# Altium PCB 2layer.PcbDoc (part 1 of 2)
Units mil, origin at the board's own origin, x right, y up, seen from the top; angles counter-clockwise.
Board outline 4180.03 x 3445.03 mil, 2 copper layers (Top Layer, Bottom Layer); 118 components, 103 nets, 464 pads, 261 vias.
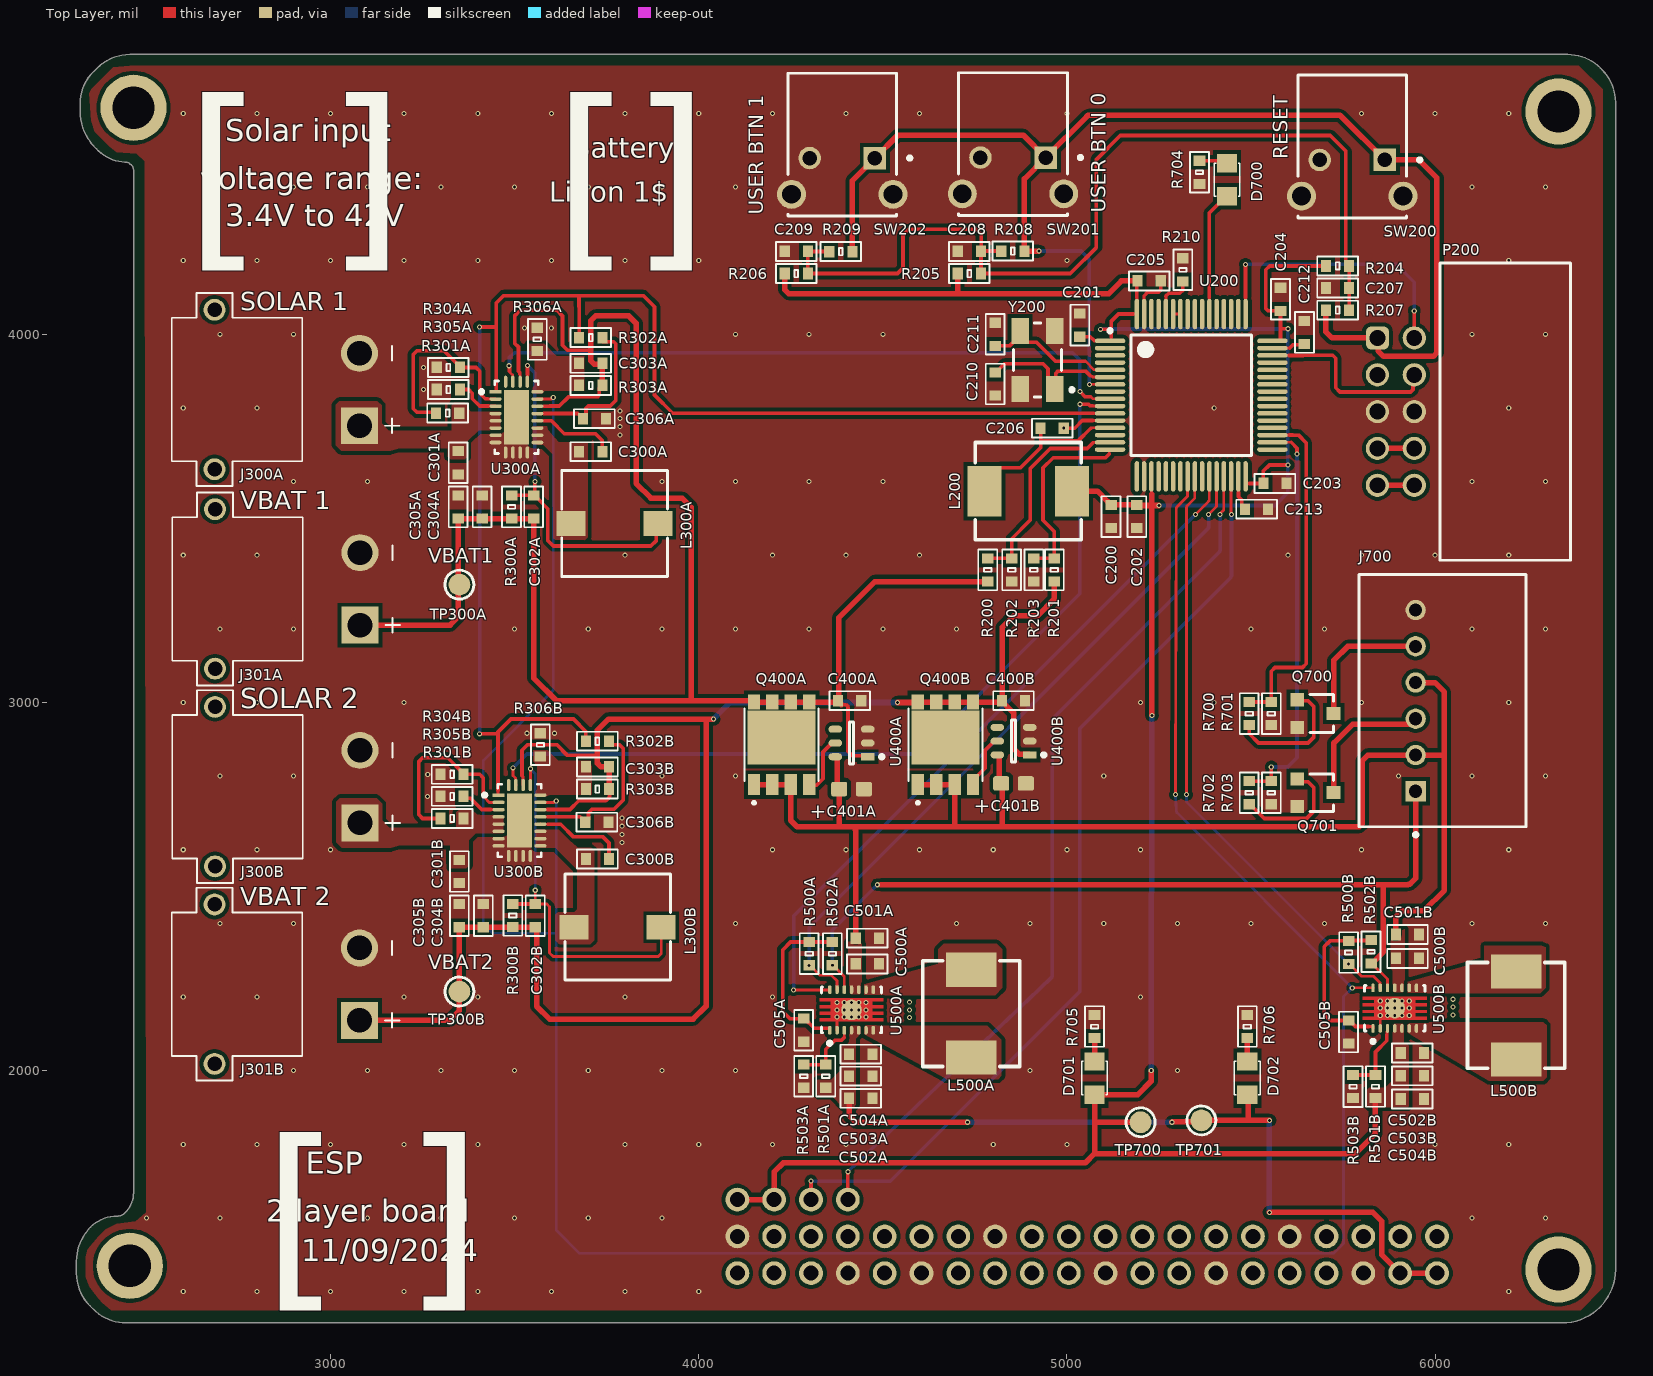
[diagram p0: Top Layer view]
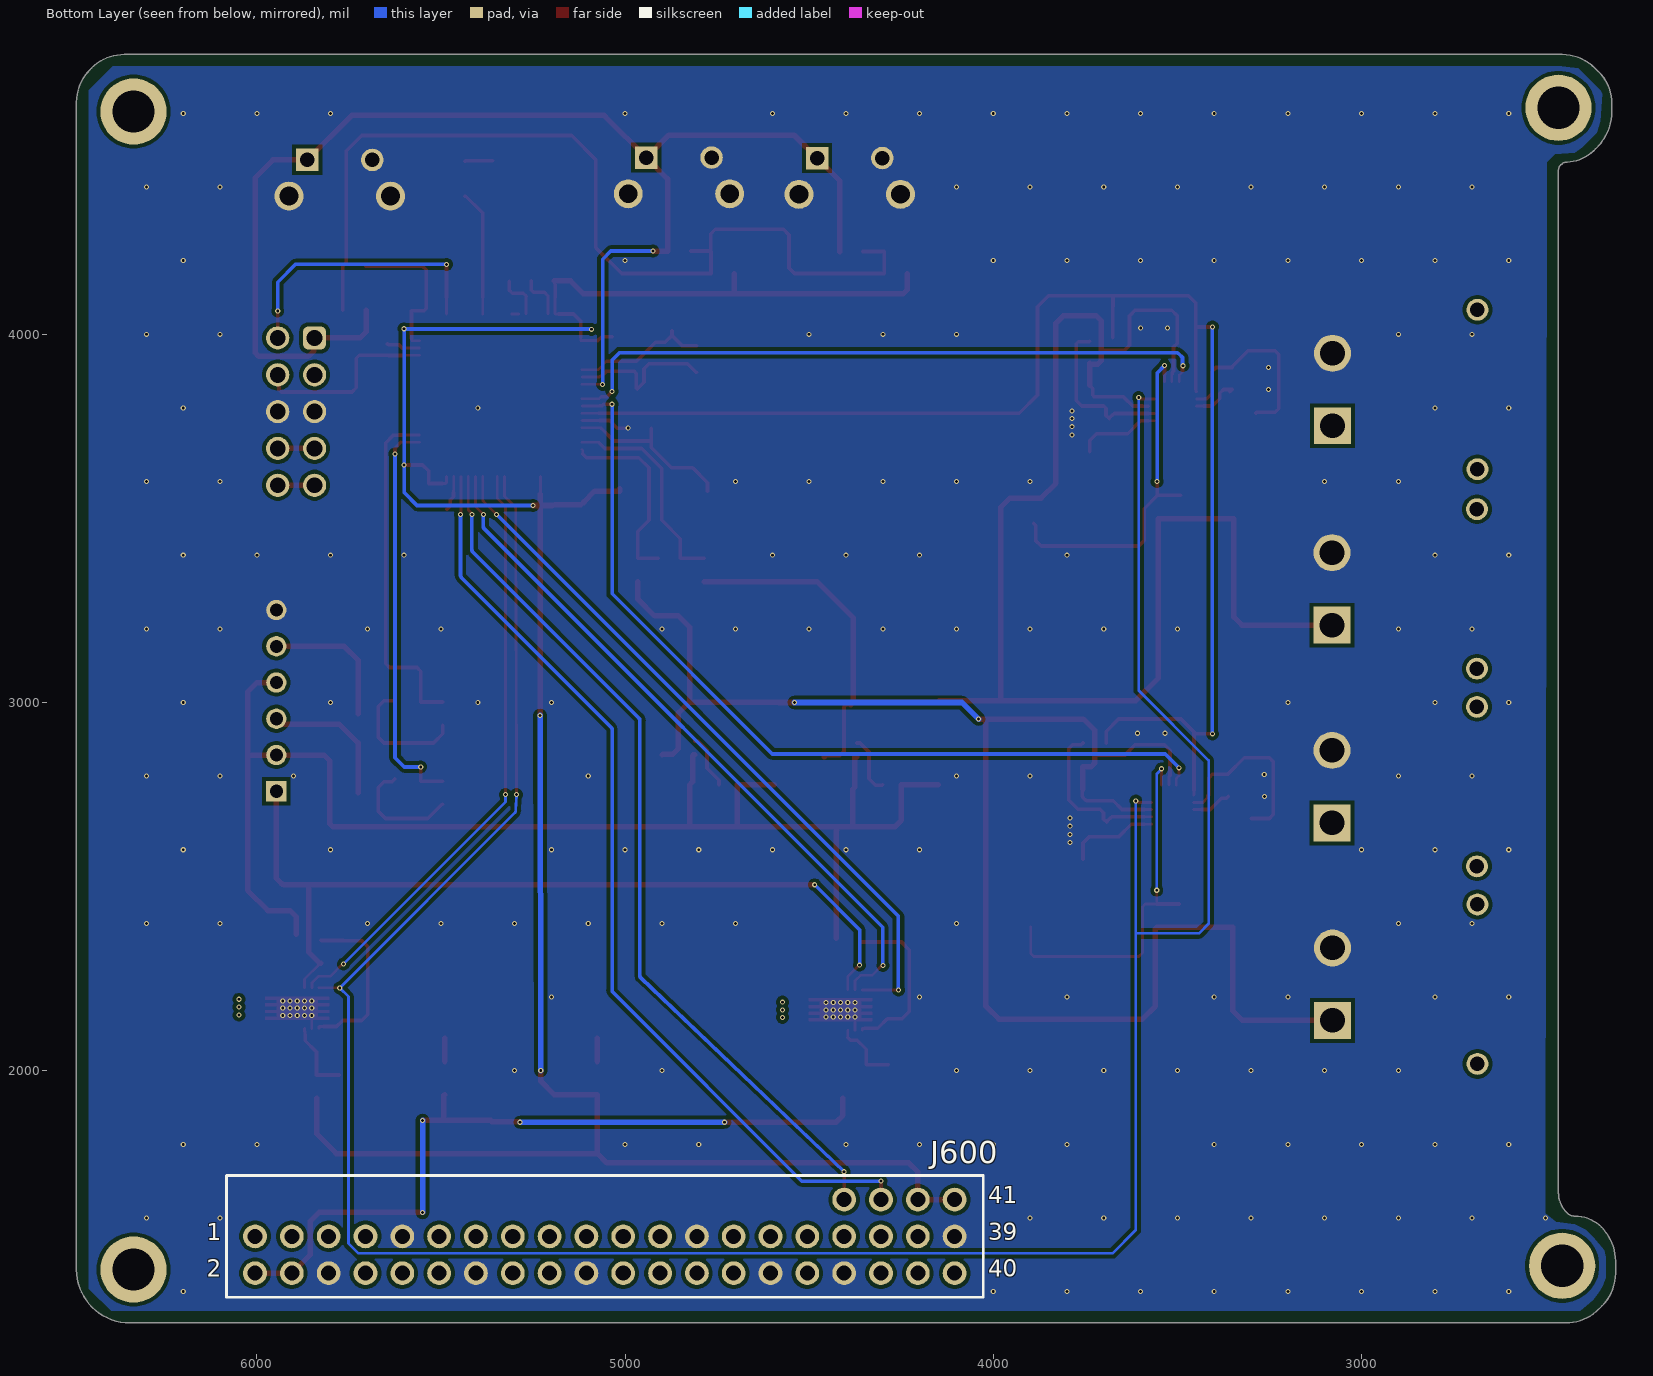
[diagram p1: Bottom Layer view, seen from below]

## Layer stack, top to bottom
Top Solder: solder mask 0.4, Solder Resist, Dk 3.5
Top Layer: signal copper 1.4
Dielectric 1: dielectric 12.6, FR-4, Dk 4.8
Bottom Layer: signal copper 1.4
Bottom Solder: solder mask 0.4, Solder Resist, Dk 3.5

## Board outline
2346.81,1361.1 cw(c2435.71,1450) 2309.99,1450 2309.99,1482.53 2309.98,1482.57 cw(c2441.21,1482.57) 2348.42,1575.37 cw(c2420,1503.79) 2420,1605.02 2420.86,1605.02 ccw(c2420.86,1634.14) 2441.45,1613.55 2442.06,1614.15 ccw(c2386.72,1669.5) 2464.98,1669.23 2464.98,1669.25 2464.99,4446.26 ccw(c2446.62,4446.26) 2456.16,4461.95 2452.44,4465.47 ccw(c2440.53,4433.42) 2441.84,4467.59 cw(c2446.16,4578.27) 2364.61,4503.3 cw(c2461.02,4606.18) 2320.03,4606.26 2319.93,4625.73 2319.93,4625.83 cw(c2443.77,4625.72) 2356.2,4713.29 2366.45,4723.55 cw(c2454.5,4635.5) 2454.5,4760.02 6360,4760.02 cw(c6360,4634.29) 6448.9,4723.19 6453.55,4718.55 cw(c6365.5,4630.5) 6490.02,4630.5 6490.02,1460 6490.01,1459.83 cw(c6345,1460) 6345,1314.98 6344.96,1314.98 2445,1314.98 cw(c2445,1440.71) 2356.1,1351.81

## Design rules (kind name [scope] priority, off if disabled: settings)
Clearance [All] p1: gap=10 ignorepadtopadclearanceinfootprint=TRUE
PolygonConnect [All] p1: connectstyle=Direct reliefconductorwidth=10 reliefentries=4 polygonreliefangle="90 Angle" airgapwidth=10
RoutingVias [All] p1: holewidth=9.84 width=15.75 viastyle="Through Hole" minholewidth=7.87 minwidth=7.87 maxholewidth=19.68 maxwidth=39.37
SolderMaskExpansion [All] p1: expansion=4 istentingtop=FALSE
SupplyNets "Schematic Supply Nets_6" [InNet('VBUS')] p1: voltage=0.000
SupplyNets "Schematic Supply Nets_5" [InNet('GND')] p2: voltage=0.000
SupplyNets "Schematic Supply Nets_4" [InNet('3.3VDDA')] p3: voltage=0.000
SupplyNets "Schematic Supply Nets_3" [InNet('5V_STLINK')] p4: voltage=0.000
SupplyNets "Schematic Supply Nets_2" [InNet('3.3V_STLINK')] p5: voltage=0.000
SupplyNets "Schematic Supply Nets_1" [InNet('3.3V')] p6: voltage=0.000
SupplyNets "Schematic Supply Nets" [InNet('5V')] p7: voltage=0.000
UnRoutedNet [All] p1: checkbadconnections=TRUE
Width [All] p1: maxlimit=50 minlimit=5 preferedwidth=15 minimp=50.000000 maximp=50.000000 favimp=50.000000
29 further rules are at their usual default settings.

## Classes and differential pairs
channel class "MPPT CC CV charger (A)": MPPT_charger1 MPPT_charger2
channel class "Ideal Diode (A)": "Ideal Diode1" "Ideal Diode2"
component class uC: C200 C201 C202 C203 C204 C205 C206 C207 C208 C209 C210 C211 C212 C213 L200 P200 R200 R201 R202 R203 R204 R205 R206 R207 R208 R209 R210 SW200 SW201 SW202 U200 Y200
component class Peripherals: D700 D701 D702 J700 Q700 Q701 R700 R701 R702 R703 R704 R705 R706 TP700 TP701
component class MPPT_charger2: C300B C301B C302B C303B C304B C305B C306B J301B L300B R300B R301B R302B R303B R304B R306A TP300B U300b
component class MPPT_charger1: C300A C301A C302A C303A C304A C305A C306A J300A J301A L300A R300A R301A R302A R303A R304A R305A R306A TP300B U300b
component class "Main connector": J600
component class "Ideal Diode2": C400B C401B Q400B U400B
component class "Ideal Diode1": C400A C401A Q400A U400A
component class buck_boost: 3 C500B C502B C503B C504B C505B L500B R500B R501B R502B R503B U500B

## Components (designator, comment, footprint, x,y, rotation, side; value= is the part's Value field where it differs from the comment)
C200 "4u7" CN-SMD-0603 5120,3505 r90 top
C201 "100n" CN-SMD-0603 5035,4025 r270 top
C202 "100n" CN-SMD-0603 5190,3505 r90 top
C203 "100n" CN-SMD-0603 5565,3595 r180 top
C204 "100n" CN-SMD-0603 5580,4095 r270 top
C205 "100n" CN-SMD-0603 5223.5,4145 r180 top
C206 "1u" CN-SMD-0603 4960,3745 r180 top
C207 "100n" CN-SMD-0603 5734.98,4125.59 r0 top
C208 "100n" CN-SMD-0603 4735,4225 r0 top
C209 "100n" CN-SMD-0603 4265,4225 r0 top
C210 "20p" CN-SMD-0603 4805,3865 r90 top
C211 "20p" CN-SMD-0603 4805,4000 r270 top
C212 "2u2" CN-SMD-0603 5645,4005 r270 top
C213 "2u2" CN-SMD-0603 5515,3525 r180 top
C300A "100n" CN-SMD-0603 3706.71,3681.1 r0 top
C300B "100n" CN-SMD-0603 3725,2575 r0 top (schematic designator C300A)
C301A "10u" CN-SMD-0603 3346.71,3651.1 r90 top
C301B "10u" CN-SMD-0603 3350,2541 r90 top (schematic designator C301A)
C302A "1u" CN-SMD-0603 3551.71,3531.1 r270 top
C302B "1u" CN-SMD-0603 3556,2421 r270 top (schematic designator C302A)
C303A "10p" CN-SMD-0603 3706.71,3921.1 r0 top
C303B "10p" CN-SMD-0603 3725,2825 r0 top (schematic designator C303A)
C304A "22u" CN-SMD-0603 3411.71,3531.1 r270 top
C304B "22u" CN-SMD-0603 3415,2421 r270 top (schematic designator C304A)
C305A "22u" CN-SMD-0603 3346.71,3531.1 r270 top
C305B "22u" CN-SMD-0603 3350,2421 r270 top (schematic designator C305A)
C306A "1u" CN-SMD-0603 3716.75,3770.95 r180 top
C306B "1u" CN-SMD-0603 3723.5,2675 r180 top (schematic designator C306A)
C400A "100n" CN-SMD-0603 4410,3005 r180 top
C400B "100n" CN-SMD-0603 4855,3005 r180 top (schematic designator C400A)
C401A "22u" CAP_TANT_0603 4415,2765 r0 top
C401B "22u" CAP_TANT_0603 4855,2780 r0 top (schematic designator C401A)
C500A "10u" CN-SMD-0603 4458,2290 r180 top
C500B "10u" CN-SMD-0603 5925,2305 r180 top
C501A "10u" CN-SMD-0603 4458,2360 r180 top
C501B "10u" CN-SMD-0603 5925,2370 r180 top
C502A "22u" CN-SMD-0603 4440,1925 r0 top
C502B "22u" CN-SMD-0603 5938,2048 r0 top
C503A "22u" CN-SMD-0603 4440,1985 r0 top
C503B "22u" CN-SMD-0603 5938,1986 r0 top
C504A "22u" CN-SMD-0603 4440,2045 r0 top
C504B "22u" CN-SMD-0603 5938,1923 r0 top
C505A "100n" CN-SMD-0603 4285,2110 r90 top
C505B "100n" CN-SMD-0603 5765,2105 r90 top
D700 "LED" LED-0805-Green 5435,4375 r90 top
D701 "LED" LED-0805-Green 5075,1935 r90 top
D702 "LED" LED-0805-Green 5490,1935 r90 top
J300A "XT30PW-M" AMASS_XT30PW-M 2685,3850 r90 top
J300B "XT30PW-M" AMASS_XT30PW-M 2686.3,2771.57 r90 top (schematic designator J300A)
J301A "XT30PW-M" AMASS_XT30PW-M 2686.3,3308.43 r90 top
J301B "XT30PW-M" AMASS_XT30PW-M 2685,2235 r90 top (schematic designator J301A)
J600 "RPI GPIO Connector + 4 Cubesat pins" "header 40 pins" 5055,1500 r180 bottom
J700 "S6B-XH-A-1(LF)(SN)" FP-S6B-XH-A-1_LF_SN-MFG 6020,3005 r270 top
L200 "4u7" L-SMD-0630 4895,3574 r90 top
L300A "10u" L-SMD-M-7.3x4.5 3771.71,3486.1 r90 top
L300B "10u" L-SMD-M-7.3x4.5 3780,2390 r90 top (schematic designator L300A)
L500A "1u5" L-SMD-0630 4740,2155 r0 top
L500B "1u5" L-SMD-0630 6220,2150 r0 top
P200 "61201021721" 61201021721 6190,3790 r90 top
Q400A "TPCA8120" "Mosfet P channel" 4225,2885 r90 top
Q400B "TPCA8120" "Mosfet P channel" 4670,2885 r90 top (schematic designator Q400A)
Q700 "AO3400" SOT23-123 5675,2970 r270 top
Q701 "AO3400" SOT23-123 5675,2755 r270 top
R200 "10k" RES-SMD-0603 4785,3360 r90 top
R201 "10k" RES-SMD-0603 4965.63,3359.98 r90 top
R202 "33k" RES-SMD-0603 4850,3360 r270 top
R203 "33k" RES-SMD-0603 4910,3360 r270 top
R204 "10k" RES-SMD-0603 5734.98,4185.59 r0 top
R205 "10k" RES-SMD-0603 4735,4165 r0 top
R206 "10k" RES-SMD-0603 4265,4165 r0 top (schematic designator 206)
R207 "100R" RES-SMD-0603 5734.98,4065.59 r180 top
R208 "100R" RES-SMD-0603 4853,4226 r0 top
R209 "100R" RES-SMD-0603 4385.84,4224.59 r0 top
R210 "10k" RES-SMD-0603 5315,4175 r90 top
R300A "0.025R" RES-SMD-0603 3491.71,3531.1 r90 top
R300B "0.025R" RES-SMD-0603 3495,2421.5 r90 top (schematic designator R300A)
R301A "300k" RES-SMD-0603 3318,3786 r0 top
R301B "300k" RES-SMD-0603 3330,2685 r0 top (schematic designator R301A)
R302A "10k" RES-SMD-0603 3706.71,3991.1 r0 top
R302B "10k" RES-SMD-0603 3725,2895 r0 top (schematic designator R302A)
R303A "1M" RES-SMD-0603 3706.71,3861.1 r180 top
R303B "1M" RES-SMD-0603 3725,2765 r180 top (schematic designator R303A)
R304A "33k" RES-SMD-0603 3320,3910 r0 top
R304B "33k" RES-SMD-0603 3330,2805 r0 top (schematic designator R304A)
R305A "6k4" RES-SMD-0603 3320,3850 r0 top
R305B "6k4" RES-SMD-0603 3330,2745 r0 top (schematic designator R305A)
R306A "309k" RES-SMD-0603 3561.71,3986.1 r90 top
R306B "309k" RES-SMD-0603 3570,2885 r90 top (schematic designator R306A)
R500A "10k" RES-SMD-0603 4300,2318 r270 top
R500B "10k" RES-SMD-0603 5765,2321 r270 top
R501A "1M" RES-SMD-0603 4345,1985 r90 top
R501B "1M" RES-SMD-0603 5838,1957 r90 top
R502A "10k" RES-SMD-0603 4363,2318 r270 top
R502B "10k" RES-SMD-0603 5826,2323 r270 top
R503A "180k/110k" RES-SMD-0603 4285,1985 r270 top
R503B "180k/110k" RES-SMD-0603 5777,1957 r270 top
R700 "100R" RES-SMD-0603 5495,2970 r90 top
R701 "10k" RES-SMD-0603 5555,2970 r270 top
R702 "100R" RES-SMD-0603 5495,2755 r90 top
R703 "10k" RES-SMD-0603 5555,2755 r270 top
R704 "1k" RES-SMD-0603 5360,4440 r270 top
R705 "1k" RES-SMD-0603 5075,2120 r90 top
R706 "2k2" RES-SMD-0603 5490,2120 r90 top
SW200 "EVQ-PF006K" FP-EVQ-PF006K-MFG 5775,4510 r180 top
SW201 "EVQ-PF006K" FP-EVQ-PF006K-MFG 4853.58,4516.42 r180 top
SW202 "EVQ-PF006K" FP-EVQ-PF006K-MFG 4390,4515 r180 top
TP300A "Test-Point" TESTPOINT 3350,3320 r90 top
TP300B "Test-Point" TESTPOINT 3350,2215 r90 top (schematic designator TP300A)
TP700 "Test-Point" TESTPOINT 5200,1860 r90 top
TP701 "Test-Point" TESTPOINT 5365,1865 r90 top
U200 "STM32F405RGT6" STM-LQFP64_M 5337.64,3834.53 r0 top
U300A "LT8611EUDD#TRPBF" FP-UDD-24-05-08-1833-IPC_B 3505,3775 r0 top
U300B "LT8611EUDD#TRPBF" FP-UDD-24-05-08-1833-IPC_B 3513.29,2679.53 r0 top (schematic designator U300A)
U400A "LTC4412ES6#TRMPBF" FP-S6-6-05-08-1636-IPC_C 4415,2890 r180 top
U400B "LTC4412ES6#TRMPBF" FP-S6-6-05-08-1636-IPC_C 4855,2895 r180 top (schematic designator U400A)
U500A "TPS63020DSJT" FP-DSJ0014A-MFG 4415,2165 r90 top
U500B "TPS63020DSJT" FP-DSJ0014A-MFG 5890.31,2169.88 r90 top
Y200 "8MHz" FP-ABM3B-MFG 4920,3930 r90 top

## Footprints (in the part's own frame and the unit in brackets; to place one, negate y for a bottom-side part, rotate by r counter-clockwise, add the part's x,y. Pads: shape width x height; smd on the part's side, far side on the other; paste and mask are expansions set on the pad)
61201021721 [mm] "10 pins, right angled, gold plating"
  rrect50% 1.6x1.6 hole 1.1: 1(5.08,8.805)
  round 1.6 hole 1.1: 2(5.08,6.265) 3(2.54,8.805) 4(2.54,6.265) 5(0,8.805) 6(0,6.265) 7(-2.54,8.805) 8(-2.54,6.265) 9(-5.08,8.805) 10(-5.08,6.265)
  silkscreen extent -10.26,-4.5 10.26,4.5, body extent -10.18,-4.42 10.18,9.13, height 9.23
AMASS_XT30PW-M [mm]
  round 2.55 hole 1.7: N(2.5,-10)
  rect 2.55x2.55 / inner round 2.55 / far side rect 2.55x2.55 hole 1.7: P(-2.5,-10)
  round 1.508 hole 1: S1(5.5,0) S2(-5.5,0)
  silkscreen extent -6.65,-12.75 6.65,2.95, body extent -6.65,-11 6.65,2.95, height 5
CAP_TANT_0603 [mm]
  rrect25% 1.1x1 smd: A(-0.85,0) K(0.85,0)
  body extent -0.9,-0.53 0.9,0.53, height 0.91
CN-SMD-0603 [mm]
  rect 0.7x0.8 smd: 1(-0.8,0) 2(0.8,0)
  silkscreen extent -1.4,-0.65 1.4,0.65, body extent -0.8,-0.4 0.8,0.4, height 0.3
FP-ABM3B-MFG [mm]
  rect 1.8x1.2 smd paste+0 mask+0: 1(-2,-1.2) 2(2,-1.2) 3(2,1.2) 4(-2,1.2)
  silkscreen extent -2.55,-2.5 2.55,1.65, body extent -3,-1.9 3,1.9, height 0.25
FP-DSJ0014A-MFG [mm]
  rrect100% 0.6x0.24 smd paste+0 mask+0: 1(-1.4,1.5) 2(-1.4,1) 3(-1.4,0.5) 4(-1.4,0) 5(-1.4,-0.5) 6(-1.4,-1) 7(-1.4,-1.5) 8(1.4,-1.5) 9(1.4,-1) 10(1.4,-0.5) 11(1.4,0) 12(1.4,0.5) 13(1.4,1) 14(1.4,1.5)
  round 1.422 smd paste-1000 mask+0: 15(0,0)
  Top Layer region: -0.79,2.2 -0.59,2.2 -0.59,1.425 -0.33,1.425 -0.33,2.2 -0.13,2.2 -0.13,1.425 0.13,1.425 0.13,2.2 0.33,2.2 0.33,1.425 0.59,1.425 0.59,2.2 0.79,2.2 0.79,-2.2 0.59,-2.2 0.59,-1.425 0.33,-1.425 0.33,-2.2 0.13,-2.2 0.13,-1.425 -0.13,-1.425 -0.13,-2.2 -0.33,-2.2 -0.33,-1.425 -0.59,-1.425 -0.59,-2.2 -0.79,-2.2 -0.79,2.2
  silkscreen extent -2.42,-2.07 1.58,2.07, body extent -1.8,-2.3 1.8,2.3, height 0.25
FP-EVQ-PF006K-MFG [mm]
  round 2 hole 1.3 paste-2539.97 mask+0: 1(-3.5,3.425) 2(3.5,3.425)
  rect 1.55x1.55 hole 1 paste-2539.97 mask+0: A(-2.25,0.925)
  round 1.55 hole 1 paste-2539.97 mask+0: B(2.25,0.925)
  silkscreen extent -4.78,-4.92 3.75,4.92, body extent -4.6,-5.02 4.6,5.02, height 0.25
FP-S6-6-05-08-1636-IPC_C [mm]
  rect 0.94x0.486 smd paste+0 mask+0: 1(-1.115,0.95)
  rrect100% 0.94x0.486 smd paste+0 mask+0: 2(-1.115,0) 3(-1.115,-0.95) 4(1.116,-0.95) 5(1.116,0) 6(1.116,0.95)
  silkscreen extent -2.21,-1.45 0.15,1.45, body extent -1.69,-1.55 1.69,1.55, height 0.25
FP-S6B-XH-A-1_LF_SN-MFG [mm]
  rect 1.4x1.4 hole 0.9 paste-2539.97 mask+0: 1(6.25,-1.85)
  round 1.4 hole 0.9 paste-2539.97 mask+0: 2(3.75,-1.85) 3(1.25,-1.85) 4(-1.25,-1.85) 5(-3.75,-1.85) 6(-6.25,-1.85)
  silkscreen extent -8.7,-5.75 9.37,5.75, body extent -8.8,-5.85 8.8,5.85, height 0.25
FP-UDD-24-05-08-1833-IPC_B [mm]
  rect 0.831x0.242 smd paste+0 mask+0: 1(-1.441,1.75)
  rrect100% 0.831x0.242 smd paste+0 mask+0: 2(-1.441,1.25) 3(-1.441,0.75) 4(-1.441,0.25) 5(-1.441,-0.25) 6(-1.441,-0.75) 7(-1.441,-1.25) 8(-1.441,-1.75) 13(1.441,-1.75) 14(1.441,-1.25) 15(1.441,-0.75) 16(1.441,-0.25) 17(1.441,0.25) 18(1.441,0.75) 19(1.441,1.25) 20(1.441,1.75)
  rrect100% 0.242x0.831 smd paste+0 mask+0: 9(-0.75,-2.441) 10(-0.25,-2.441) 11(0.25,-2.441) 12(0.75,-2.441) 21(0.75,2.441) 22(0.25,2.441) 23(-0.25,2.441) 24(-0.75,2.441)
  rect 1.75x3.75 smd paste-1000 mask+0: 25(0,0)
  silkscreen extent -2.53,-2.5 1.5,2.5, body extent -2.11,-3.11 2.11,3.11, height 0.25
"header 40 pins" [mil]
  round 64.57 hole 40.95: 1(-950,50) 2(-950,-50) 3(-850,50) 4(-850,-50) 5(-750,50) 6(-750,-50) 7(-650,50) 8(-650,-50) 9(-550,50) 10(-550,-50) 11(-450,50) 12(-450,-50) 13(-350,50) 14(-350,-50) 15(-250,50) 16(-250,-50) 17(-150,50) 18(-150,-50) 19(-50,50) 20(-50,-50) 21(50,50) 22(50,-50) 23(150,50) 24(150,-50) 25(250,50) 26(250,-50) 27(350,50) 28(350,-50) 29(450,50) 30(450,-50) 31(550,50) 32(550,-50) 33(650,50) 34(650,-50) 35(750,50) 36(750,-50) 37(850,50) 38(850,-50) 39(950,50) 40(950,-50) 41(950,150) 42(850,150) 43(750,150) 44(650,150)
  silkscreen extent -1028,-115 1028,215, body extent -1010,-98 1010,197, height 335
L-SMD-0630 [mm] "6.6x6.6"
  rect 3.5x2.35 smd: 1(0,-3.025) 2(0,3.025)
  silkscreen extent -3.35,-3.65 3.35,3.65, body extent -3.35,-3.65 3.35,3.65, height 2.81
L-SMD-M-7.3x4.5 [mm] "WE-PDA SMD Shielded Power Inductor, 7345"
  rect 1.7x2 smd: 1(0,3) 2(0,-3)
  silkscreen extent -3.65,-3.65 3.65,3.65, body extent -3.65,-3.65 3.65,3.65, height 4.05
LED-0805-Green [mil]
  rect 50x55 smd: 1(0,0) 2(90,0)
  silkscreen extent 0,-35 90,35, body extent 5,-25 85,25, height 43
"Mosfet P channel" [mm] "TPCA8120"
  rect 1.45x0.85 smd: 1(-2.75,1.905) 2(-2.75,0.635) 3(-2.75,-0.635) 4(-2.75,-1.905)
  rect 1.05x0.85 smd: 5(2.95,-1.905) 6(2.95,-0.635) 7(2.95,0.635) 8(2.95,1.905)
  rect 3.75x4.7 smd paste-3: 9(0.508,0)
  silkscreen extent -4.1,-2.55 2.5,2.55, body extent -3,-2.65 3,2.65, height 1
RES-SMD-0603 [mm]
  rect 0.7x0.8 smd: 1(-0.8,0) 2(0.8,0)
  silkscreen extent -1.4,-0.65 1.4,0.65, body extent -0.8,-0.4 0.8,0.4, height 0.43
SOT23-123 [mm] "SOT23, 1=bottom-left, 2=top, 3=bottom-right"
  rect 0.9x0.95 smd: 1(-0.95,-1.25) 2(0,1.25)
  rect 0.9x0.95 smd mask+0: 3(0.95,-1.25)
  silkscreen extent -1.3,-0.38 1.3,1.25, body extent -1.52,-1.23 1.48,1.27, height 1.06
STM-LQFP64_M [mm] "Thin QFP, 64-Leads, Body 10x10mm, Pitch 0.5mm, IPC Low Density"
  oval 2.1x0.3 smd: 1(-5.6,3.75) 2(-5.6,3.25) 3(-5.6,2.75) 4(-5.6,2.25) 5(-5.6,1.75) 6(-5.6,1.25) 7(-5.6,0.75) 8(-5.6,0.25) 9(-5.6,-0.25) 10(-5.6,-0.75) 11(-5.6,-1.25) 12(-5.6,-1.75) 13(-5.6,-2.25) 14(-5.6,-2.75) 15(-5.6,-3.25) 16(-5.6,-3.75) 33(5.6,-3.75) 34(5.6,-3.25) 35(5.6,-2.75) 36(5.6,-2.25) 37(5.6,-1.75) 38(5.6,-1.25) 39(5.6,-0.75) 40(5.6,-0.25) 41(5.6,0.25) 42(5.6,0.75) 43(5.6,1.25) 44(5.6,1.75) 45(5.6,2.25) 46(5.6,2.75) 47(5.6,3.25) 48(5.6,3.75)
  oval 0.3x2.1 smd: 17(-3.75,-5.6) 18(-3.25,-5.6) 19(-2.75,-5.6) 20(-2.25,-5.6) 21(-1.75,-5.6) 22(-1.25,-5.6) 23(-0.75,-5.6) 24(-0.25,-5.6) 25(0.25,-5.6) 26(0.75,-5.6) 27(1.25,-5.6) 28(1.75,-5.6) 29(2.25,-5.6) 30(2.75,-5.6) 31(3.25,-5.6) 32(3.75,-5.6) 49(3.75,5.6) 50(3.25,5.6) 51(2.75,5.6) 52(2.25,5.6) 53(1.75,5.6) 54(1.25,5.6) 55(0.75,5.6) 56(0.25,5.6) 57(-0.25,5.6) 58(-0.75,5.6) 59(-1.25,5.6) 60(-1.75,5.6) 61(-2.25,5.6) 62(-2.75,5.6) 63(-3.25,5.6) 64(-3.75,5.6)
  silkscreen extent -5.72,-4.15 4.15,4.57, body extent -5,-5 5,5, height 1.6
TESTPOINT [mm]
  round 1.5 smd: 1(0,0)
  silkscreen extent -1,-1 1,1

## Part data
C200 C201 C202 C203 C204 C205 C206 C207 C208 C209 C210 C211 C212 C213 C300A C300B C301A C301B C302A C302B C303A C303B C304A C304B C305A C305B C306A C306B C400A C400B C500A C500B C501A C501B C502A C502B C503A C503B C504A C504B C505A C505B: library part CN
C401A C401B: library part CAP_TANT_0603, "Capacitor SMD Tantalum 0603"
D700 D701 D702: library part "LED SMD"
J300A J300B J301A J301B: "Socket; DC supply; XT30; male; PIN: 2; on PCBs; THT; Colour: yellow"
J600: library part "Header 40 pins"
J700: library part CMP-17439-000023-1, "CONN HEADER R/A P6OS 2.5MM"
L200 L300A L300B L500A L500B: library part L-SMD-1
P200: library part CMP-1502-00021-2
Q400A Q400B: library part "Mosfet P channel"
Q700 Q701: "N-MOS 30V 5.8A"
R200 R201 R202 R203 R204 R205 R206 R207 R208 R209 R210 R300A R300B R301A R301B R302A R302B R303A R303B R304A R304B R305A R305B R306A R306B R500A R500B R501A R501B R502A R502B R503A R503B R700 R701 R702 R703 R704 R705 R706: library part Res-SMD, "Resistor"
SW200 SW201 SW202: library part CMP-00287-39802768-1, "EVQ-PF006K Switch Tactile N.O. SPST Round Button PC Pins 0.02A 15VDC 1N Thru-Hole Bulk"
U200: library part CMP-0243-00019-3, "ARM Cortex-M4 32-bit MCU+FPU, 210 DMIPS, 1024 kB Flash, 192 kB Internal RAM, 51 I/Os, 64-pin LQFP, -40 to 85 degC, Tray"
U300A U300B: library part CMP-0491-02169-2, "IC REG BUCK ADJ 2.5A 24QFN"
U400A U400B: library part CMP-0479-00425-2, "IC OR CTRLR SRC SELECT TSOT23-6"
U500A U500B: library part CMP-2000-07282-2, "IC REG BCK BST ADJ 3.5A 14VSON"
Y200: library part CMP-1688-00002-2, "Crystal 8MHz ±20ppm 18pF SMD-4 5mm x 3.2mm"

## Free pads (board coordinates)
  round 180 hole 115: 3(2455,1470) 3(2465,4615) 3(6335,1460) 3(6335,4605)

## Via types
v1: diameter 13.78, hole 7.87, Top Layer to Bottom Layer, 261 vias

## Nets (pads, with @x,y where several pads share a name; then routed paths per layer and width w, separated by ;. In a path a pad name is that pad's centre, name@x,y a point inside that pad or via, vN(x,y) a via of type N, cw(c..) or ccw(c..) an arc to the next point about the centre after c; other vN are vias at no path point)
3.3V: C200.2 C201.2 C202.2 C203.2 C204.2 C205.2 C502B.1 C503B.1 C504B.1 D701.1 J600.41 J600.42 L200.1 R204.1 R205.1 R206.1 R501B.1 TP700.1 U200.1 U200.19 U200.32 U200.48 U200.64 U500B.4 U500B.5 | length 7663.9
  Top Layer w7.5: 5074.01,3982.99 5116.34,3982.99 U200.1@5117.17,3982.17 ; U200.1@5120.17,3982.17 5120.17,3990 ; 5180,4055 U200.64@5190,4055 5190,4100 ; 5229.37,3565.63 U200.19@5229.37,3614.06 cw(c5221.9,3613.39) 5229.4,3613.39 5229.4,3578.62 ccw(c5249.06,3578.62) U200.19@5229.4,3578.29 ; U200.32@5485.28,3614.06 5485.28,3596.99 5487.27,3595 5495,3595 ; U200.48@5558.11,3982.17 5578.01,3982.17 5580,3984.16 5580,3990
  Top Layer w10: C201.2@5035,3993.5 5063.5,3993.5 5074.01,3982.99 ; v1(5091.42,4013.58) 5120,4013.58 ; 5120,3992.17 5120,4013.58 ; 5180,4055 5140,4055 5120,4035 5120,4013.58 ; 5190,4100 5189.69,4100.31 5189.69,4112.97 5190,4113.28 5190,4134.25 C205.2@5192.01,4145 ; 5495,3595 C203.2@5533.5,3595 5533.5,3628.5 5550,3645 v1(5600,3645) ; 5580,3990 5580,4015 ; v1(5600,4015) 5580,4015 ; R204.1@5703.48,4185.59 5550.59,4185.59 5540,4175 5540,4070 5546.5,4063.5 C204.2@5580,4063.5 5580,4015
  Top Layer w15: J600.41@4105,1650 J600.42@4205,1650 4205,1725 4230,1750 5050,1750 5075,1775 ; R206.1@4233.5,4165 4233.5,4121.5 4245,4110 4705,4110 ; R205.1@4703.5,4165 4703.5,4111.5 4705,4110 ; L200.1@5014.09,3574 5082.5,3574 5111.75,3544.74 C200.2@5111.75,3542.78 ; L200.1@5014.09,3580 L200.1@5015,3579.09 ; C200.2@5120,3536.5 C202.2@5190,3536.5 5198.25,3535 5230,3535 ; C205.2@5192.01,4145 5148,4145 5113,4110 4705,4110 ; TP700.1@5200,1860 5075,1860 ; v1(5229,2000) 5229,1971.5 5192.5,1935 D701.1@5075,1935 5075,1860 ; 5230,3565 5230,3535 ; v1(5231,2965) 5230,2966 5230,3006.21 5230,3535 ; v1(5250,3535) 5230,3535 ; R501B.1@5838,1925.5 5838,1829 5784,1775 5075,1775 ; 5075,1775 5075,1860
  Bottom Layer w10: v1(5091.42,4013.58) 5092.13,4014.29 5599.29,4014.29 v1(5600,4015) v1(5600,3645) 5600,3570 5565,3535 v1(5250,3535)
  Bottom Layer w15: v1(5229,2000) v1(5231,2965)
3.3V_STLINK: P200.7 P200.8 | length 100
  Top Layer w15: P200.7@5843.35,3690 P200.8@5943.35,3690
3.3VDDA: C206.2 L200.2 U200.13 | length 471.4
  Top Layer w7.5: 5065.94,3745 5066.89,3745.94 U200.13@5117.17,3745.94
  Top Layer w10: L200.2@4775.91,3574 4775.91,3596.64 4817.17,3637.9 4874.61,3637.9 4928.5,3691.79 4928.5,3710 ; C206.2@4928.5,3745 4928.5,3710 ; 5065.94,3745 5065,3745 5030,3710 4928.5,3710
5V: C502A.1 C503A.1 C504A.1 D702.1 J600.2 J600.4 R501A.1 TP701.1 U500A.4 U500A.5 | length 2095.2
  Top Layer w15: C502A.1@4408.5,1925 4408.5,1878.5 4427,1860 v1(4730,1860) ; v1(5285,1860) 5285.72,1860.72 5360.72,1860.72 TP701.1@5365,1865 5492,1865 ; D702.1@5490,1935 5492,1933 5492,1865 ; v1(5550,1615) 5831,1615 5855.22,1590.79 5855.22,1499.79 J600.4@5905,1450 J600.2@6005,1450 ; v1(5550,1865) 5492,1865
  Bottom Layer w15: v1(4730,1860) v1(5285,1860) ; v1(5550,1615) v1(5550,1865)
5V_STLINK: P200.9 P200.10 | length 100
  Top Layer w15: P200.9@5843.35,3590 P200.10@5943.35,3590
BIAS_A_MPPT_charger1: C302A.2 C303A.2 C304A.2 C305A.2 C400A.2 J301A.P Q400A.5 Q400A.6 Q400A.7 Q400A.8 R200.1 R300A.1 R303A.1 TP300A.1 U300A.18 U300A.22 U400A.1 | length 5075.9
  Top Layer w7.5: U300A.22@3515,3871.24 3515,3890
  Top Layer w10: 3513.91,3891.88 3513.91,3896.95 3510.4,3900.46 3510.4,3965.4 3500,3975.79 3500,4050 3515,4065 3615,4065 3630,4050 3630,3970 3642.94,3957.06 3703.56,3957.06 3706.5,3960 ; 3579.92,3804.92 3594.92,3804.92 3595,3805 3621,3805 3646,3830 3725,3830 3729.43,3834.43 3729.43,3852.32 R303A.1@3738.21,3861.1 ; C400A.2@4387.28,2994.25 4398.75,2994.25 ; 4399.75,2994.25 4406.5,2987.5 ; 4405.5,2987.5 4405.5,2867.5 4418,2855 U400A.1@4456.52,2855
  Top Layer w15: J301A.P@3080,3210 3325,3210 3346.71,3231.71 C305A.2@3346.71,3499.61 C304A.2@3411.71,3499.61 C302A.2@3551.71,3499.61 3551.71,3066.29 3613,3005 3975,3005 ; R303A.1@3738.21,3861.1 C303A.2@3738.21,3921.1 3736.11,3919 3716,3919 3706.5,3928.5 3706.5,3960 3706.5,4036.5 3720,4050 3810,4050 3830,4030 3830,3595 3870,3555 3955,3555 3980,3530 3980,3010 3975,3005 ; Q400A.8@4150,3001.14 4146.14,3005 3975,3005 ; Q400A.8@4151.14,3001.14 Q400A.7@4200,3001.14 Q400A.6@4250,3001.14 Q400A.5@4300,3001.14 C400A.2@4372.36,3001.14 ; C400A.2@4387.28,2994.25 4378.5,3003.03 C400A.2@4378.5,3005 4380,3006.5 4380,3230 4478.5,3328.5 R200.1@4785,3328.5 ; U400A.1@4456.52,2855 U400A.1@4458.92,2852.6
BIAS_A_MPPT_charger2: C302B.2 C303B.2 C304B.2 C305B.2 C400B.2 J301B.P Q400B.5 Q400B.6 Q400B.7 Q400B.8 R201.1 R300B.1 R303B.1 TP300B.1 U300B.18 U300B.22 U400B.1 | length 4666.4
  Top Layer w7.5: 3520,2801.03 3522.74,2798.29 U300B.22@3522.74,2776 ; U300B.18@3570.39,2709.45 3589.45,2709.45
  Top Layer w10: 3520,2801.03 3520,2870 3535,2885 3615,2885 3642.5,2857.5 ; 3589.45,2709.45 3650.45,2709.45 3674,2733 3743.86,2733 ccw(c3743.86,2743) 3750.91,2735.91 3755.09,2740.09 ccw(c3748,2747.14) 3758,2747.14 3758,2754.25 R303B.1@3756.5,2765 ; 3642.5,2856.5 3722.5,2856.5
  Top Layer w15: J301B.P@3078.7,2136.57 3323.43,2136.57 3350,2163.15 TP300B.1@3350,2215 C305B.2@3350,2389.5 C304B.2@3415,2389.5 C302B.2@3556,2389.5 3560,2385.5 3560,2175 3595,2140 3985,2140 4020,2175 4020,2955 ; 3722.5,2857.5 3725,2860 ; R303B.1@3756.5,2765 C303B.2@3756.5,2825 3735,2825 3725,2835 3725,2860 ; v1(4040,2955) 4020,2955 ; v1(4540,3000) 4583.27,3000 Q400B.8@4595,3001.14 Q400B.7@4645,3001.14 Q400B.6@4695,3001.14 Q400B.5@4745,3001.14 C400B.2@4819.65,3001.14 ; C400B.2@4823.5,3003.03 4855,2971.54 4855,2875 4870.34,2859.66 4896.85,2859.66 U400B.1@4898.92,2857.6 ; C400B.2@4824.18,3003.71 4824.18,3204.18 4855,3235 4920,3235 4965.63,3280.63 R201.1@4965.63,3328.48 ; 3725,2860 3725,2925 3755,2955 4020,2955
  Bottom Layer w15: v1(4040,2955) 4085,3000 v1(4540,3000)
BOOT0: R210.1 U200.60 | length 125.2
  Top Layer w7.5: U200.60@5268.74,4055 5268.74,4103.74
  Top Layer w10: 5268.74,4103.74 5276.34,4111.34 5306.34,4111.34 5315,4120 R210.1@5315,4143.5
BST_A_MPPT_charger1: C300A.2 U300A.16 | length 229.3
  Top Layer w7.5: U300A.16@3561.71,3765.16 3561.95,3764.92 3580,3764.92
  Top Layer w10: 3580,3764.92 3600.08,3764.92 3635,3730 3720,3730 3738.21,3711.79 C300A.2@3738.21,3681.1
BST_A_MPPT_charger2: C300B.2 U300B.16 | length 251.2
  Top Layer w7.5: U300B.16@3570,2669.69 3570.24,2669.45 3590,2669.45
  Top Layer w10: 3590,2669.45 3625.55,2669.45 3660,2635 3740,2635 3756.5,2618.5 C300B.2@3756.5,2575
C_LED3V3: D701.2 R705.1 | length 63.5
  Top Layer w15: D701.2@5075,2025 R705.1@5075,2088.5
C_LED5V: D702.2 R706.1 | length 63.5
  Top Layer w15: D702.2@5490,2025 R706.1@5490,2088.5
C_LED_USR: D700.2 R704.1 | length 75.6
  Top Layer w10: R704.1@5360,4471.5 5433.5,4471.5 D700.2@5435,4470
"EN 5V 3V3": J700.1 R502A.2 R502B.2 U500A.12 U500B.12 | length 2367.4
  Top Layer w7.5: R502A.2@4364.97,2286.5 4395,2256.47 ; 4395,2255 4395,2220.43 U500A.12@4395.31,2220.12 ; R502B.2@5827.97,2291.5 5870.63,2248.84 U500B.12@5870.63,2225
  Top Layer w10: v1(4363,2286.5) R502A.2@4364.97,2286.5 ; v1(4485,2505) 4494,2505
  Top Layer w15: 4494,2505 5857,2505 ; R502B.2@5826,2291.5 5827.97,2291.5 5859.25,2322.78 5859.25,2502.75 5857,2505 ; J700.1@5947.17,2758.94 5947.17,2522.17 5934.39,2509.39 cw(c5923.79,2520) 5923.79,2505 5857,2505
  Bottom Layer w10: v1(4363,2286.5) 4363,2383 v1(4485,2505)
EN_A_MPPT_charger1: C301A.2 J300A.P R301A.2 U300A.4 U300A.5 U300A.6
EN_A_MPPT_charger2: C301B.2 J300B.P R301B.2 U300B.4 U300B.5 U300B.6
FB_A_MPPT_charger1: C303A.1 R303A.2 R306A.1 U300A.20
FB_A_MPPT_charger2: C303B.1 R303B.2 R306B.1 U300B.20
FB_TPS_A: R501A.2 R503A.1 U500A.3 | length 184.8
  Top Layer w7.5: 4395,2090 4395,2109.57 U500A.3@4395.31,2109.88
  Top Layer w10: R503A.1@4285,2016.5 R501A.2@4345,2016.5 4345,2058 4370,2083 4388,2083 4395,2090
FB_TPS_B: R501B.2 R503B.1 U500B.3 | length 201.3
  Top Layer w7.5: 5868.58,2097.42 5868.58,2099.19 5869.42,2100.02 5869.42,2106 5870.63,2107.21 U500B.3@5870.63,2114.76 U500B.3@5870.26,2114.39
  Top Layer w10: R503B.1@5777,1988.5 R501B.2@5838,1988.5 5838,2051 5868.58,2081.58 5868.58,2097.42
G1: Q700.1 R700.1 | length 351.5
  Top Layer w10: R700.1@5495,2938.5 5495,2915 5520,2890 5655,2890 5670,2905 5670,2990 5655,3005 5628.19,3005 Q700.1@5625.79,3007.4
G2: Q701.1 R702.1 | length 318.3
  Top Layer w10: R702.1@5495,2723.5 5496.97,2723.5 5535.59,2684.88 5650.7,2684.88 5670,2704.18 5670,2770 5655,2785 5633.19,2785 Q701.1@5625.79,2792.4
"G_OR_A_Ideal Diode1": Q400A.4 U400A.5 | length 162.1
  Top Layer w10: Q400A.4@4300,2776.73 4301.73,2775 4320,2775 4337.58,2792.58 4337.58,2865.44 4362.15,2890 U400A.5@4371.08,2890
"G_OR_A_Ideal Diode2": Q400B.4 U400B.5 | length 150.9
  Top Layer w10: Q400B.4@4745,2776.73 4745,2788.54 4777.58,2821.13 4777.58,2870.44 4802.15,2895 U400B.5@4811.08,2895